# Altium PCB PCB2.PcbDoc
Units mil, origin at the board's own origin, x right, y up, seen from the top; angles counter-clockwise.
Board outline 1985 x 1860 mil, 2 copper layers (Top Layer, Bottom Layer); 58 components, 44 nets, 226 pads, 52 vias.
Unrouted connection lines stored in the file: 9.
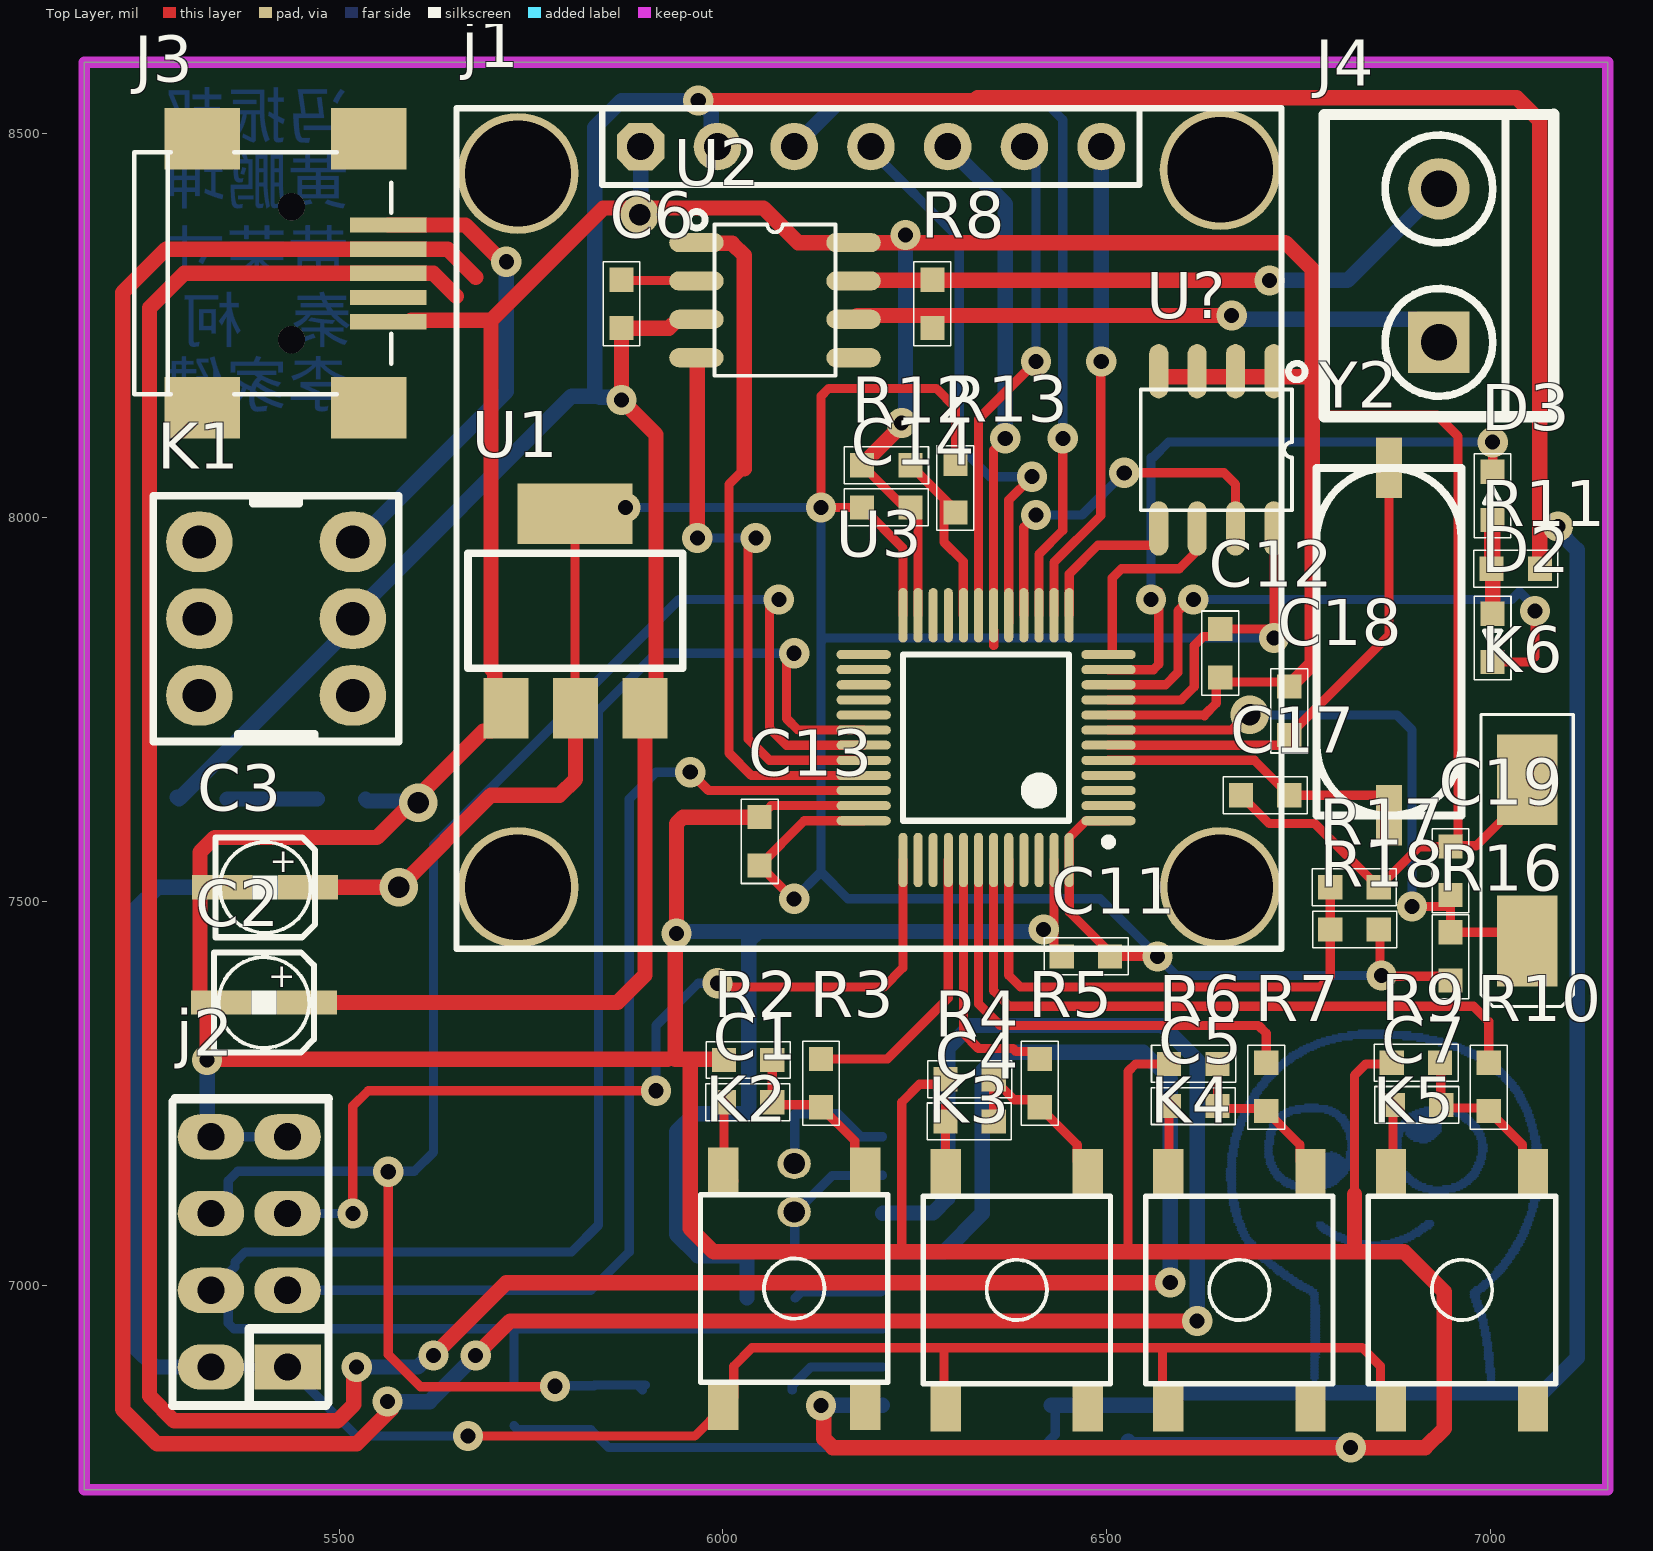
[diagram p0: Top Layer view]
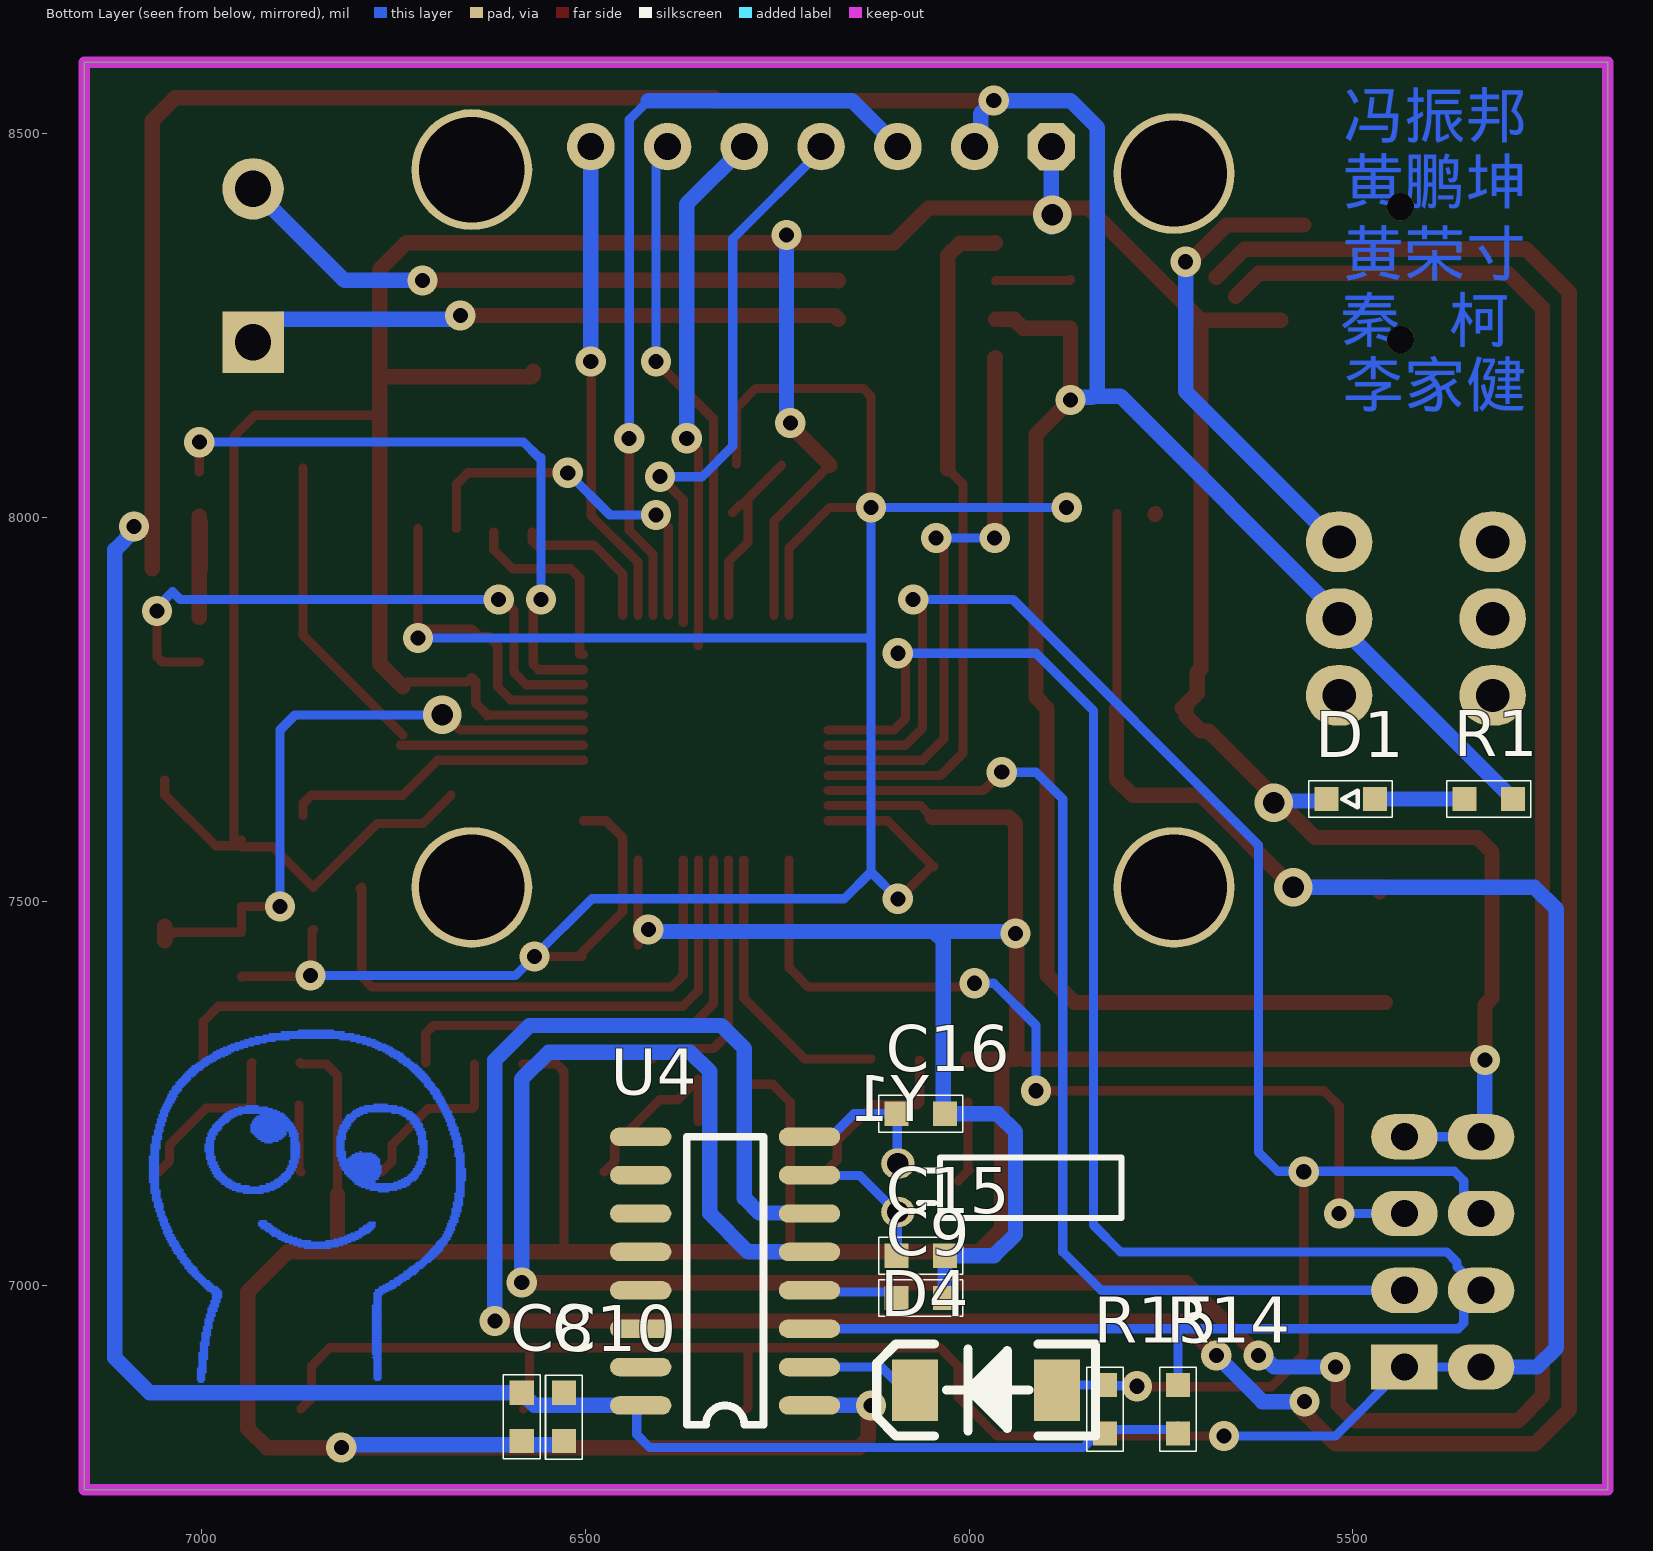
[diagram p1: Bottom Layer view, seen from below]
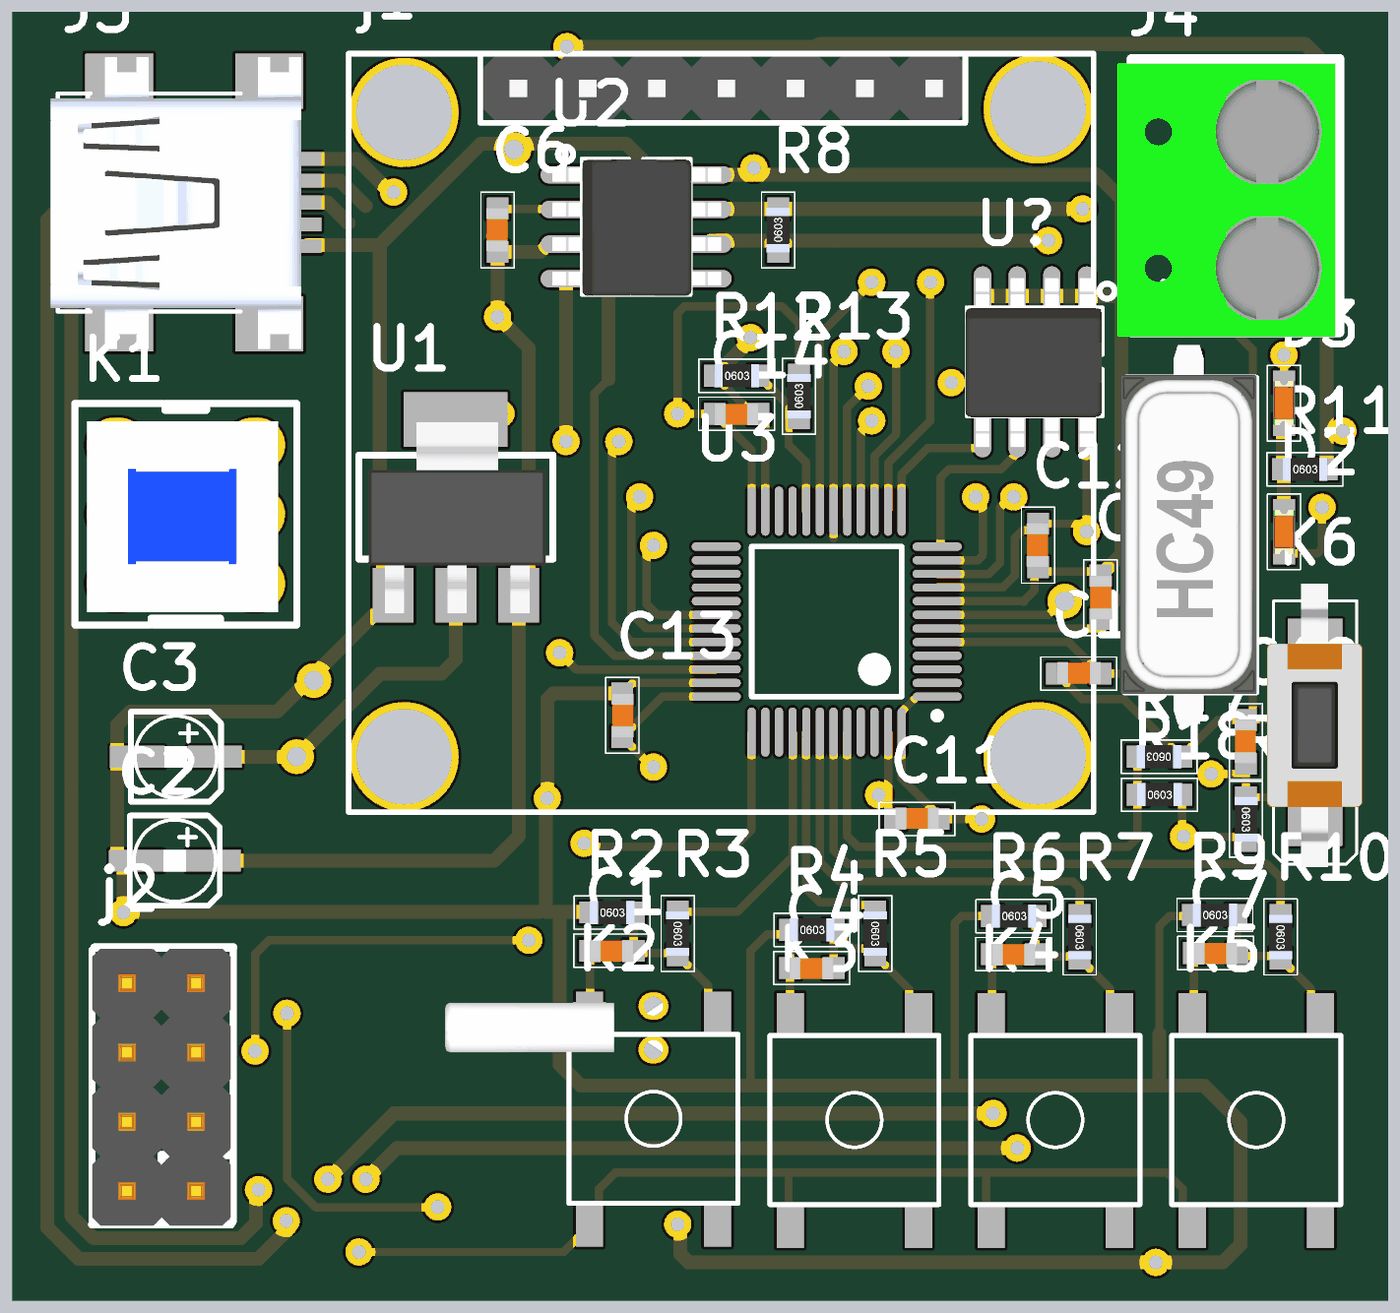
[diagram p2: 3D render of the assembled board from above, using the file's embedded part models]
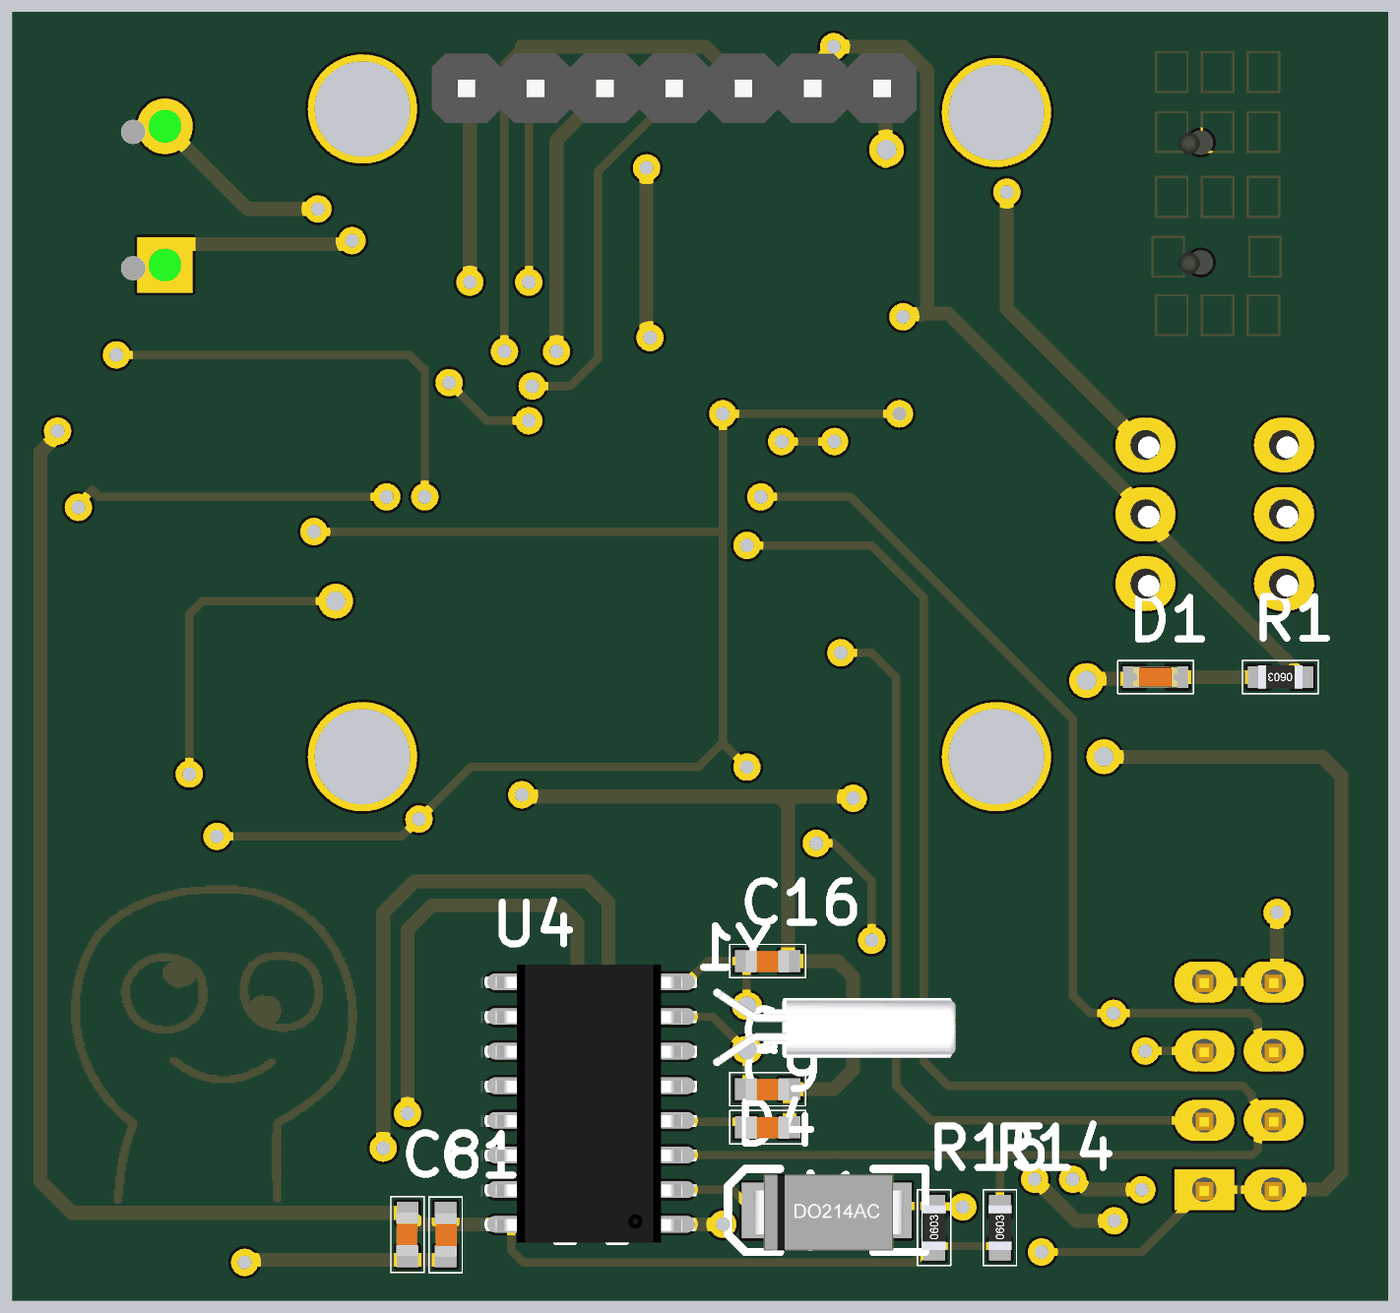
[diagram p3: 3D render of the assembled board from below, using the file's embedded part models]

## Layer stack, top to bottom
Top Solder: solder mask 0.4, Solder Resist, Dk 3.5
Top Layer: signal copper 1.4
Dielectric 1: dielectric 12.6, FR-4, Dk 4.8
Bottom Layer: signal copper 1.4
Bottom Solder: solder mask 0.4, Solder Resist, Dk 3.5

## Board outline
5168,6733.5 7153,6733.5 7153,8593.5 5168,8593.5

## Design rules (kind name [scope] priority, off if disabled: settings)
Clearance [All] p1: gap=5 ignorepadtopadclearanceinfootprint=FALSE
PolygonConnect [All] p1: connectstyle=Relief reliefconductorwidth=10 reliefentries=4 polygonreliefangle="90 Angle" airgapwidth=10
RoutingVias [All] p1: holewidth=19.68 width=39.37 viastyle="Through Hole" minholewidth=7.87 minwidth=10 maxholewidth=500 maxwidth=500
SolderMaskExpansion [All] p1: expansion=4
Width [All] p1: maxlimit=50 minlimit=10 preferedwidth=20
30 further rules are at their usual default settings.

## Components (designator, comment, footprint, x,y, rotation, side; value= is the part's Value field where it differs from the comment)
C1 "104" C_0603 6033,7238.5 r180 top
C2 "10uf" SMD-EC-F3 5458,7368.5 r180 top
C3 "10uf" SMD-EC-F3 5459.61,7518.5 r180 top
C4 "104" C_0603 6321.58,7213.5 r180 top
C5 "104" C_0603 6613,7233.5 r180 top
C6 "107" C_0603 5868,8278.5 r90 top
C7 "104" C_0603 6904.5,7235 r180 top
C8 "104" C_0603 6583,6828.5 r90 bottom
C9 "103" C_0603 6063,6983.5 r0 bottom
C10 "22U" C_0603 6528,6828.5 r270 bottom
C11 "104" C_0603 6473,7428.5 r0 top
C12 "104" C_0603 6648,7823.5 r90 top
C13 "104" C_0603 6048,7578.5 r270 top
C14 "104" C_0603 6213,8013.5 r180 top
C15 "22P" C_0603 6063,7038.5 r0 bottom
C16 "22P" C_0603 6063,7223.5 r0 bottom
C17 "22P" C_0603 6706.5,7638.5 r0 top
C18 "22P" C_0603 6738,7748.5 r270 top
C19 "104" C_0603 6948,7540 r90 top
D1 "LED" LED_0603 5503,7633.5 r0 bottom value=BLUE
D2 "LED" LED_0603 7003,7843.5 r270 top value=BLUE
D3 "LED" LED_0603 7003,8028.5 r90 top value=BLUE
D4 "SMAJ5.0CA" DO-214-A 5978,6863.5 r0 bottom
j1 "OLED" OLED_7 6113,8433.5 r0 top locked
j2 "COM4x2-2.54" COM4X2-2.54 5383,7043.5 r90 top
J3 "USB-MINI" USB-MINI 5443,8318.5 r90 top locked
J4 "CON_2PIN" CON_2PIN 6933,8328.5 r270 top
K1 "SW-6" SW-6 5418,7868.5 r180 top
K2 "SW-PB" SW6.2/6.2-SMD 6093,6995.24 r270 top
K3 "SW-PB" SW6.2/6.2-SMD 6383,6993.5 r270 top
K4 "SW-PB" SW6.2/6.2-SMD 6673,6993.5 r270 top
K5 "SW-PB" SW6.2/6.2-SMD 6963,6993.5 r270 top
K6 "SW-PB" SW-PB4 7048,7553.5 r90 top
R1 "1K" R_0603 5323,7633.5 r0 bottom
R2 "4.7k" R_0603 6033,7293.5 r0 top
R3 "1k" R_0603 6128,7263.5 r270 top
R4 "4.7k" R_0603 6321.58,7268.5 r0 top
R5 "1k" R_0603 6413,7263.5 r270 top
R6 "4.7k" R_0603 6613,7288.5 r0 top
R7 "1k" R_0603 6708,7258.5 r270 top
R8 "120R" R_0603 6273,8278.5 r90 top
R9 "4.7k" R_0603 6903,7290 r0 top
R10 "1k" R_0603 6998,7258.5 r270 top
R11 "1K" R_0603 7033,7933.5 r0 top
R12 "10K" R_0603 6213,8068.5 r0 top
R13 "10K" R_0603 6303,8038.5 r90 top
R14 "10k" R_0603 5728,6838.5 r90 bottom
R15 "10k" R_0603 5823,6838.5 r90 bottom
R16 "10K" R_0603 6948,7428.5 r270 top
R17 "10K" R_0603 6823,7518.5 r180 top
R18 "10K" R_0603 6823,7463.5 r0 top
U1 "AMS1117" SOT-223 5808,7878.5 r0 top
U2 "TJA1050" SOP8 6068,8283.5 r0 top
U3 "STM32F102CBT6" STM-LQFP48_N 6343,7713.5 r180 top locked
U4 "CH340G" SOP16 6318,7018.5 r0 bottom
U? "AT24C02" SOP8 6643,8088.5 r270 top
Y1 "XTAL_32.768KHZ" CRYS-3X8 6093,7127.01 r0 bottom value=12MHz
Y2 "XTAL_49US" XTAL_SMD 6868,7838.5 r270 top value=8MHz

## Footprints (in the part's own frame and the unit in brackets; to place one, negate y for a bottom-side part, rotate by r counter-clockwise, add the part's x,y. Pads: shape width x height; smd on the part's side, far side on the other; paste and mask are expansions set on the pad)
C_0603 [mm]
  rect 0.8x0.8 smd: 1(-0.8,0) 2(0.8,0)
  silkscreen extent -1.38,-0.61 1.4,0.61, body extent -0.79,-0.38 0.81,0.42, height 0.5
COM4X2-2.54 [mm]
  rect 1.5x2.2 hole 0.9: 1(-3.81,-1.27)
  oval 1.5x2.2 hole 0.9: 2(-3.81,1.27) 3(-1.27,-1.27) 4(-1.27,1.27) 5(1.27,-1.27) 6(1.27,1.27) 7(3.81,-1.27) 8(3.81,1.27)
  silkscreen extent -5.08,-2.63 5.07,2.54, body extent -5.13,-2.54 5.03,2.54, height 10.1
CON_2PIN [mil]
  rect 80x80 hole 47.24: 1(100,0)
  round 80 hole 47.24: 2(-100,0)
  silkscreen extent -197,-150 197,150, body extent -190,-171 203,144, height 433
CRYS-3X8 [mm]
  oval 1.1x1 hole 0.7: 1(0,0.8) 2(0,-0.8)
  silkscreen extent -7.4,-1 -0.7,1, body extent -7.64,-1.44 1.24,1.41, height 1.47
DO-214-A [mil]
  rect 60x80 smd: 1(-92.5,0) 2(92.5,0)
  silkscreen extent -143,-60 142,60, body extent -111,-52 105,58, height 90
LED_0603 [mm]
  rect 0.8x0.8 smd: 1(-0.8,0) 2(0.8,0)
  silkscreen extent -1.38,-0.6 1.39,0.61, body extent -0.8,-0.4 0.82,0.4, height 0.6
OLED_7 [mil]
  round 157.48 hole 137.8: 0(-380,-915) 0(-380,15) 0(535,-915) 0(535,20)
  oct 62x62 hole 35: 1(-220,50)
  round 62 hole 35: 2(-120,50) 3(-20,50) 4(80,50) 5(180,50) 6(280,50) 7(380,50)
  silkscreen extent -460,-995 615,100, body extent -265,0 435,100, height 118
R_0603 [mm]
  rect 0.8x0.8 smd: 1(-0.8,0) 2(0.8,0)
  silkscreen extent -1.38,-0.61 1.4,0.61, body extent -0.81,-0.42 0.83,0.43, height 0.46
SMD-EC-F3 [mm]
  rect 2x0.8 smd: 1(0,0) 2(2.835,0)
  silkscreen extent -0.23,-1.65 3.07,1.65
SOP8 [mm]
  oval 1.8x0.635 smd: 1(-2.6,1.905) 2(-2.6,0.635) 3(-2.6,-0.635) 4(-2.6,-1.905) 5(2.6,-1.905) 6(2.6,-0.635) 7(2.6,0.635) 8(2.6,1.905)
  silkscreen extent -2.86,-2.5 2,2.94, body extent -3.07,-2.54 3.13,2.46, height 1.74
SOP16 [mil]
  oval 80x24 smd: 1(-110,175) 2(-110,125) 3(-110,75) 4(-110,25) 5(-110,-25) 6(-110,-75) 7(-110,-125) 8(-110,-175) 9(110,-175) 10(110,-125) 11(110,-75) 12(110,-25) 13(110,25) 14(110,75) 15(110,125) 16(110,175)
  silkscreen extent -50,-175 50,200, body extent -153,-200 159,202, height 71
SOT-223 [mil]
  rect 59x79 smd: 1(-90.55,-126.77) 2(0,-126.77) 3(90.55,-126.77)
  rect 150x79 smd: 2(-0.67,126.77)
  silkscreen extent -140,-75 140,75, body extent -126,-153 130,123, height 65
STM-LQFP48_N [mm] "QFP, 48-Leads, Body 7x7mm, Pitch 0.5mm, IPC Medium Density"
  oval 1.8x0.3 smd: 1(-4.05,2.75) 2(-4.05,2.25) 3(-4.05,1.75) 4(-4.05,1.25) 5(-4.05,0.75) 6(-4.05,0.25) 7(-4.05,-0.25) 8(-4.05,-0.75) 9(-4.05,-1.25) 10(-4.05,-1.75) 11(-4.05,-2.25) 12(-4.05,-2.75) 25(4.05,-2.75) 26(4.05,-2.25) 27(4.05,-1.75) 28(4.05,-1.25) 29(4.05,-0.75) 30(4.05,-0.25) 31(4.05,0.25) 32(4.05,0.75) 33(4.05,1.25) 34(4.05,1.75) 35(4.05,2.25) 36(4.05,2.75)
  oval 0.3x1.8 smd: 13(-2.75,-4.05) 14(-2.25,-4.05) 15(-1.75,-4.05) 16(-1.25,-4.05) 17(-0.75,-4.05) 18(-0.25,-4.05) 19(0.25,-4.05) 20(0.75,-4.05) 21(1.25,-4.05) 22(1.75,-4.05) 23(2.25,-4.05) 24(2.75,-4.05) 37(2.75,4.05) 38(2.25,4.05) 39(1.75,4.05) 40(1.25,4.05) 41(0.75,4.05) 42(0.25,4.05) 43(-0.25,4.05) 44(-0.75,4.05) 45(-1.25,4.05) 46(-1.75,4.05) 47(-2.25,4.05) 48(-2.75,4.05)
  silkscreen extent -4.18,-2.75 2.75,3.57, body extent -3.5,-3.5 3.5,3.5, height 1.6
SW6.2/6.2-SMD [mm]
  rect 1.5x1 smd: 1(-3.924,2.35) 1(3.924,2.35) 2(-3.924,-2.35) 2(3.924,-2.35)
  silkscreen extent -3.11,-3.1 3.09,3.1
SW-6 [mm]
  oval 2.2x2 hole 1.1: 1(-2.54,2.54) 2(-2.54,0) 3(-2.54,-2.54) 4(2.54,2.54) 5(2.54,0) 6(2.54,-2.54)
  silkscreen extent -4.06,-4.06 4.06,4.06, body extent -3.38,-3.41 3.62,3.59, height 13
SW-PB4 [mm]
  rect 3x2 smd: 1(-2.667,0) 2(2.667,0)
  silkscreen extent -4.83,-1.52 4.83,1.52, body extent -4.94,-1.73 5.46,1.77, height 5
USB-MINI [mm]
  rect 0.508x2.54 smd: 1(1.6,-3.075) 2(0.8,-3.075) 3(0,-3.075) 4(-0.8,-3.075) 5(-1.6,-3.075)
  rect 2.032x2.5 smd: 6(-4.45,-2.425) 7(-4.45,3.075) 8(4.45,3.075) 9(4.45,-2.425)
  round 0.9 hole 0.9 unplated: 10(2.2,0.125) 11(-2.2,0.125)
  silkscreen extent -4,-3.17 4,5.33, body extent -5.38,-3.61 5.32,5.59, height 3.95
XTAL_SMD [mm]
  rect 2x0.85 smd: 1(-5.75,0) 2(5.75,0)
  silkscreen extent -5.75,-2.4 5.75,2.4, body extent -6.97,-2.56 6.93,2.44, height 4.5

## Part data
C1 C4 C5 C6 C7 C8 C9 C10 C11 C12 C13 C14 C15 C16 C17 C18 C19: library part CAP
C2 C3: library part CAP+
D4: "SMAJ5.0CA-E3/61 400W 5V", Manufacture 1 P/N=SMAJ5.0CA, PCB DECAL=DO-214
j1: library part COM7-2.54
R1 R2 R3 R4 R5 R6 R7 R8 R9 R10 R11 R12 R13 R14 R15 R16 R17 R18: library part RES
U3: "ARM Cortex-M3 32-bit MCU, 128 KB Flash, 16 KB Internal RAM, 37 I/Os, 48-pin LQFP, -40 to 85 degC, Tray", I/Os (High Current)=37, Operating Frequency(F) (Processor speed) (MHz)=48, Supplier Part Number 1=497-8308-ND, Supply Voltage(Vcc) min (V)=2, A/D Converter="1x12-bit (10 Channel)", ComponentLink1Description="Manufacturer URL", ComponentLink1URL=http://www.st.com/web/en/home.html, ComponentLink2Description=Datasheet, ComponentLink2URL=http://www.st.com/st-web-ui/static/active/en/resource/technical/document/datasheet/CD00210831.pdf, ComponentLink3Description="Package Specification", ComponentLink3URL=http://www.st.com/st-web-ui/static/active/en/resource/technical/document/datasheet/DM00058181.pdf, Core="ARM Cortex-M3", DatasheetVersion="Rev. 5", FLASH Size (Prog) (kB)=128, Internal RAM Size (kB)=16, Mounting Technology="Surface Mount", PackageDescription="48-Pin Low Profile Quad Flat Package, 7 x 7 mm Body, 0.5 mm Pitch", PackageReference=LQFP48, PackageVersion="Rev. 6, 06/2013", Packing=Tray, PartNumber=STM32F102CBT6, Supplier 1=Digi-Key, Supplier 2=Farnell, Supplier 3=Newark, Supplier 4=Newark, Supplier 5=Mouser, Supplier Part Number 2=2333154, Supplier Part Number 3=99W9776, Supplier Part Number 4=25R9430, Supplier Part Number 5=511-STM32F102CBT6
D1 D2 D3: PCB DECAL=LED_0603
J3: PCB DECAL=USB-MINI
J4: PCB DECAL=CON_2PIN
U2 U?: PCB DECAL=SOP8
U4: PCB DECAL=SOP16
Y1: PCB DECAL=CRYS-3X8
Y2: PCB DECAL=XTAL_SMD

## Via types
v1: diameter 39.37, hole 19.68, Top Layer to Bottom Layer, 48 vias
v2: diameter 50, hole 28, Top Layer to Bottom Layer, 4 vias

## Nets (pads, with @x,y where several pads share a name; then routed paths per layer and width w, separated by ;. In a path a pad name is that pad's centre, name@x,y a point inside that pad or via, vN(x,y) a via of type N, cw(c..) or ccw(c..) an arc to the next point about the centre after c; other vN are vias at no path point)
3V3: C1.2 C3.1 C4.2 C5.2 C7.2 C11.2 C12.2 C13.2 C14.2 j2.1 j2.2 K2.2 K3.2 K4.2 K5.2 R13.2 R16.2 R18.2 U1.2 U3.1 U3.9 U3.24 U3.36 U3.48 U?.8 | length 7935.3
  Top Layer w12: v1(5668,6803.5) 5963.25,6803.5 6000.48,6840.74 6014.17,6854.42 6014.17,6894.67 6038,6918.5 6288,6918.5 ; U1.2@5807.33,8005.28 5807.33,7752.4 U1.2@5808,7751.73 ; C1.2 6001.5,7150.76 6000.48,7149.74 K2.2@6014.17,7136.05 ; v1(6093,7503.5) 6091.5,7503.5 6049.75,7545.26 6046.25,7545.26 C13.2 6106.23,7605.24 U3.36 ; v1(6128,8013.5) C14.2 6234.73,7960.28 U3.24 ; v1@6128,8023.79 6128,8158.5 6138,8168.5 6278,8168.5 6303,8143.5 R13.2 ; 6290.09,7238.5 C4.2 6290.09,7148.4 K3.2@6290.48,7148 ; K3.2@6290.48,6839 6288,6841.48 6288,6918.5 ; U3.1 6473.11,7605.24 6451.27,7583.39 U3.48 6451.27,7486.73 C11.2@6509.5,7428.5 ; U3.9 6597.21,7762.72 6614.25,7779.76 6614.25,7833.5 6626,7845.25 6638.25,7845.25 C12.2 v1@6717.09,7855 ; C11.2 C11.2@6509.5,7428.5 ; v1(6566.47,7428.5) C11.2@6509.5,7428.5 ; K4.2@6580.48,6839 6573,6846.48 6573,6918.5 ; K4.2@6580.48,7148 6581.5,7149.03 C5.2 ; v1(6718,7843.5) v1@6710.41,7843.5 ; U?.8 6718,7855.91 v1@6717.09,7855 ; R18.2 6856.25,7461.75 6856.25,7405.26 v1(6858,7403.5) 6858.75,7402.76 6947.25,7402.76 R16.2@6948,7402.01 ; K5.2@6870.48,6839 6856.8,6852.69 6856.8,6894.71 6833,6918.5 6573,6918.5 ; K5.2@6870.48,7148 6873,7150.52 C7.2 ; 6288,6918.5 6573,6918.5 ; v1@6708,7845.91 v1@6710.41,7843.5 ; v1@6708,7845.91 6705.59,7843.5 v1@6710.41,7843.5 ; v1@6708,7845.91 v1@6717.09,7855
  Top Layer w20: C3.1@5465.35,7512.76 C3.1 v2(5578,7518.5) 5698,7638.5 5787.33,7638.5 5808,7659.17 U1.2@5808,7751.73 ; U1.2@5757.33,8005.28 U1.2@5758,8004.61
  Bottom Layer w12: j2.2 j2.1 5523,6803.5 v1(5668,6803.5) ; v1(5873,8013.5) v1(6128,8013.5) 6128,7838.5 ; v1(6093,7503.5) 6128,7538.5 ; v1(6718,7843.5) 6133,7843.5 6128,7838.5 ; v1(6858,7403.5) 6591.47,7403.5 v1(6566.47,7428.5) 6491.47,7503.5 6163,7503.5 6128,7538.5 ; 6128,7538.5 6128,7838.5
  Bottom Layer w20: j2.2 5260,6893.5 5235,6918.5 5235,7490 5263.5,7518.5 v2(5578,7518.5)
5V: C2.1 C6.1 C8.2 C10.1 j1.2 K1.2 R1.1 R11.2 R14.1 R15.1 U1.3 U2.3 U4.16 | length 7065.5
  Top Layer w20: C2.1 5863,7368.5 5898.55,7404.06 U1.3 5913,7766.18 5913,8108.5 v1(5868,8153.5) C6.1 5929.86,8247.01 5941.35,8258.5 U2.3 ; v1(5968,8543.5) 6328.16,8543.5 6331.91,8547.24 7034.26,8547.24 7064.5,8517.01 R11.2
  Bottom Layer w12: R14.1@5728,6817.01 5733,6812.01 5828,6812.01 5851.5,6788.5 6415.97,6788.5 6433,6805.53 6433,6838.5 U4.16
  Bottom Layer w20: R1.1 5289.26,7635.75 5293.75,7635.75 5518,7860 K1.2 5518,7873.5 5803,8158.5 5833,8158.5 ; v1(5868,8153.5) 5864.29,8157.21 5839.61,8157.21 5838.31,8158.5 5833,8158.5 ; j1.2 5984.96,8491.54 5984.96,8526.54 v1(5968,8543.5) 5868,8543.5 5833,8508.5 5833,8158.5 ; U4.16 6566.5,6843.5 C8.2 7067.47,6860 7113,6905.53 7113,7958.26 7088,7983.26 v1(7088,7988.5)
24C02_SCL: U3.12 U?.6 | length 254.8
  Top Layer w12: U3.12 6507.37,7821.77 6507.47,7821.87 6507.47,7921.47 6519.5,7933.5 6594.79,7933.5 6619.5,7958.21 U?.6@6619.5,7981.14
24C02_SDA: U3.13 U?.5 | length 201
  Top Layer w12: U3.13 6451.27,7926.77 6488.7,7964.21 6563.49,7964.21 6569.5,7970.21 U?.5@6569.5,7981.14
24C02_WP: U3.16 U?.7 | length 483.4
  Top Layer w12: U3.16 6392.21,7987.72 v1(6408,8003.5) ; v1(6523,8058.5) 6653,8058.5 6668,8043.5 U?.7
  Bottom Layer w12: v1(6408,8003.5) 6468,8003.5 v1(6523,8058.5)
CAN_RX: U2.4 U3.32 | length 739.6
  Top Layer w12: v1(6043,7973.5) 6043,7970.26 6033,7960.26 6033,7711.75 6060.78,7683.98 U3.32
  Top Layer w20: U2.4 5966.82,8207.32 v1(5966.82,7973.5)
  Bottom Layer w12: v1(5966.82,7973.5) v1(6043,7973.5)
CAN_TX: U2.1 U3.33 | length 913.5
  Top Layer w12: 6028,8063.5 6008,8043.5 6008,7693.5 6037.21,7664.29 U3.33
  Top Layer w20: U2.1 5966.59,8357.55 6012.24,8357.55 6028,8341.79 6028,8063.5
D+: J3.3 U4.5 | length 4163.7
  Top Layer w20: v1(5523,6893.5) 5519.29,6889.8 5519.29,6844.8 5498,6823.5 5285.23,6823.5 5253,6855.74 5253,8273.5 5298,8318.5 J3.3 5623,8318.5 5653,8288.5 ; v1(5623,6908.5) 5718,7003.5 v1(6583,7003.5)
  Bottom Layer w20: v1(5523,6893.5) 5602.76,6893.5 5617.76,6908.5 v1(5623,6908.5) ; U4.5 6288,7043.5 6338,7093.5 6338,7278.5 6363,7303.5 6548,7303.5 6583,7268.5 v1(6583,7003.5)
D-: J3.2 U4.6 | length 4430.7
  Top Layer w20: v1@5568,6838.5 5523,6793.5 5263,6793.5 5218,6838.5 5218,8293.5 5274.5,8350 J3.2 5641.5,8350 5678,8313.5 ; v1@5683,6903.5 v1(5678,6908.5) 5723,6953.5 v1(6618,6953.5)
  Bottom Layer w20: v1(5563,6848.5) 5618,6848.5 v1(5678,6908.5) ; U4.6 6208.77,7094.27 6273.77,7094.27 6293,7113.5 6293,7308.5 6323,7338.5 6573,7338.5 6618,7293.5 v1(6618,6953.5)
GND: C2.2 C3.2 C8.1 C9.1 C10.2 C11.1 C12.1 C13.1 C14.1 C15.1 C16.1 C17.1 C18.1 C19.2 D1.2 j1.1 j2.7 j2.8 J3.5 K6.2 R2.1 R4.1 R6.1 R9.1 R12.1 R17.1 U1.1 U2.8 U3.8 U3.23 U3.35 U3.47 U4.1 U?.1 U?.2 U?.3 U?.4 | length 11822.4
  Top Layer w12: C13.1 6062.92,7624.92 U3.35 ; R12.1 6254.46,7995.55 6254.46,7883.54 6254.42,7883.5 U3.23 ; 6233,7043.5 6233,7238.5 6256.34,7261.84 6283.43,7261.84 R4.1 ; C11.1@6431.58,7443.43 U3.47 ; 6528,7043.5 6528,7278.5 6538,7288.5 R6.1 ; 6627.53,7742.01 6626.6,7742.94 6502.54,7742.94 U3.8 6627.53,7743.03 6642.76,7758.26 6642.76,7786.76 C12.1 6654,7786 6732,7786 C18.1 ; C17.1 6711.98,7601.53 6771.47,7601.53 R17.1 6907.49,7571.5 C19.2 6949.07,7572.57 6981.75,7572.57 7048,7638.82 K6.2 ; 6768,8133.5 6930.4,8133.5 6958,8105.91 6958,7580.31 C19.2@6948,7580.31 ; 6823,7118.5 6823,7273.5 6837.76,7288.26 6869.76,7288.26 R9.1
  Top Layer w20: v1(5328,7293.5) v1@5328,7301.73 ; J3.5@5593.98,8257.13 5698,8257.13 ; U1.1 5717.45,7741.73 5697.95,7722.23 5687.95,7722.23 5549.22,7583.5 5338,7583.5 5318.78,7564.29 5318.78,7374.25 5328,7365.04 v1@5328,7301.73 ; U1.1@5722.45,7751.73 5702.95,7771.23 5702.95,7798.56 5698,7803.5 5698,8257.13 ; 5928,7294.51 5338.76,7294.51 5329.77,7303.5 v1@5328,7301.73 ; v1@5938,7448.5 5938,7294.51 5957.56,7294.51 ; v1(5939.72,7458.5) 5939.72,7601.53 5948.19,7610 C13.1 ; R2.1 6000.49,7294.51 5957.56,7294.51 ; v1(6128,6843.5) 6131.71,6839.8 6131.71,6800.22 6143.42,6788.5 v1(6818,6788.5) 6914.99,6788.5 6939.99,6813.5 6939.99,6991.52 6888,7043.5 6828,7043.5 ; R12.1 6233,8120 v1(6233,8123.5) ; U?.4 6568,8185.81 6570.31,8183.5 6768,8183.5 ; C18.1 6768,7810 6768,8133.5 6768,8183.5 ; 6823,7118.5 6823,7048.5 6828,7043.5 ; 5698,8257.13 5844.38,8403.5 6053,8403.5 6098,8358.5 U2.8 6733,8358.5 6768,8323.5 6768,8183.5 ; 5957.56,7294.51 5957.56,7073.94 5988,7043.5 6233,7043.5 6528,7043.5 6828,7043.5
  Bottom Layer w12: j2.8 j2.7
  Bottom Layer w20: v1(5328,7293.5) 5328,7299.56 5328.24,7299.8 5328.24,7198.27 j2.8 ; D1.2 5537,7631 5600.5,7631 v2(5603,7628.5) ; v2@5893,8378.5 j1.1 ; v1(5939.72,7458.5) 5942.22,7461 6046.25,7461 ; C9.1 C15.1 5967.57,7038.5 5939.72,7066.36 5939.72,7200.22 5963,7223.5 C16.1 6033.75,7225.75 6033.75,7448.5 6046.25,7461 ; v1(6128,6843.5) U4.1 ; v1(6233,8123.5) 6238,8128.5 v1(6238,8368.5) ; v1(6418,7463.5) 6415.5,7461 6046.25,7461 ; C10.2 6532.8,6792.21 6814.29,6792.21 v1(6818,6788.5)
  other v2: 5891.62,8394.88
KEY1: R3.1 U3.40 | length 378.4
  Top Layer w12: R3.1 6214.5,7295 6293.79,7374.29 U3.40
KEY2: R5.1 U3.41 | length 339.1
  Top Layer w12: U3.41 6313.47,7328.19 6333.16,7308.5 6378,7308.5 6381.76,7304.75 6403.25,7304.75 R5.1
KEY3: R7.1 U3.42 | length 616.5
  Top Layer w12: U3.42 6333.16,7366.67 6361.33,7338.5 6698,7338.5 6708,7328.5 R7.1
KEY4: R10.1 U3.43 | length 885.7
  Top Layer w12: U3.43 6352.84,7383.66 6373,7363.5 6978,7363.5 6998,7343.5 R10.1
NetC1_1: C1.1 K2.1 R2.2 R3.2 | length 227.3
  Top Layer w12: R2.2 C1.1 6067.74,7235.26 6124.75,7235.26 R3.2 6171.83,7188.17 6171.83,7163.42 K2.1@6185.52,7149.74
NetC4_1: C4.1 K3.1 R4.2 R5.2 | length 239.9
  Top Layer w12: C4.1 R4.2 6379.83,7241.76 6403.25,7241.76 R5.2 6461.83,7183.17 6461.83,7161.69 K3.1@6475.52,7148
NetC5_1: C5.1 K4.1 R6.2 R7.2 | length 224
  Top Layer w12: R6.2 C5.1 6647.74,7230.26 6704.75,7230.26 R7.2 6751.83,7183.17 6751.83,7161.69 K4.1@6765.52,7148
NetC6_2: C6.2 U2.2 | length 98.3
  Top Layer w12: C6.2 5868.75,8309.25 5964.89,8309.25 U2.2
NetC7_1: C7.1 K5.1 R9.2 R10.2 | length 223.8
  Top Layer w12: R9.2 6935.24,7289.25 6935.24,7235.75 C7.1 6939.99,7231 6994,7231 R10.2 7041.83,7183.17 7041.83,7161.69 K5.1@7055.52,7148
NetC9_2: C9.2 U4.4 | length 117.6
  Bottom Layer w12: C9.2 6102.2,6991.21 6205.7,6991.21 U4.4
NetC15_2: C15.2 U4.7 Y1.1 | length 192.5
  Bottom Layer w12: C15.2 6093.75,7039.25 6093.75,7094.76 Y1.1 6094.97,7095.51 6142.59,7143.14 6207.63,7143.14 U4.7
NetC16_2: C16.2 U4.8 Y1.2 | length 191.6
  Bottom Layer w12: Y1.2 6093.75,7159.25 6093.75,7222.76 C16.2 6150,7223.5 6180,7193.5 U4.8
NetC17_2: C17.2 U3.5 Y2.2 | length 404.5
  Top Layer w12: U3.5 6692.53,7683.98 C17.2 6857.27,7638.5 6868,7627.77 Y2.2
NetC18_2: C18.2 U3.6 Y2.1 | length 640.3
  Top Layer w12: U3.6 C18.2@6740.99,7703.66 ; C18.2 6868,7847.01 Y2.1
NetD1_1: D1.1 R1.2 | length 117
  Bottom Layer w20: R1.2 D1.1
NetD2_1: D2.1 D3.1 R11.1 | length 191.9
  Top Layer w20: R11.1 D3.1@7001.5,7993.5 ; D2.1@7003,7870 7003,7933.5 D3.1@7003,8001.89
NetD2_2: D2.2 U3.10 | length 783.2
  Top Layer w12: U3.10 6576.9,7782.4 6593,7798.5 6593,7878.5 6608,7893.5 v1(6613,7893.5) ; D2.2 7050.97,7812.01 7058,7819.04 v1(7058,7878.5)
  Bottom Layer w12: v1(6613,7893.5) 7028,7893.5 7038,7903.5 7058,7883.5 v1(7058,7878.5)
NetD3_2: D3.2 U3.11 | length 853.8
  Top Layer w12: U3.11 6560.97,7802.09 6568,7809.12 6568,7903.5 v1(6558,7893.5) ; D3.2 v1(7003,8098.5)
  Bottom Layer w12: v1(6558,7893.5) 6558,8078.5 6560.48,8078.5 6580.48,8098.5 v1(7003,8098.5)
NetD4_2: D4.2 U4.2 | length 133.4
  Bottom Layer w12: D4.2@6090.5,6863.5 6090.5,6869.5 6114.5,6893.5 U4.2
NetJ4_1: J4.1 R8.1 U2.6 | length 779.2
  Top Layer w20: U2.6 6175.36,8263.5 v1(6663,8263.5)
  Bottom Layer w20: v1(6663,8263.5) 6668,8258.5 6903,8258.5 J4.1
NetJ4_2: J4.2 R8.2 U2.7 | length 812.3
  Top Layer w20: U2.7 6171.11,8309.25 v1(6712.25,8309.25)
  Bottom Layer w20: v1(6712.25,8309.25) 6813.75,8309.25 J4.2
NetR12_2: R12.2 R13.1 U3.20 | length 251.6
  Top Layer w12: R12.2 6288,8025 ; R13.1@6308,8007.01 6298.25,8016.76 6296.24,8016.76 6288,8025 ; U3.20 6313.38,7873.05 6313.38,7943.13 6288,7968.5 6288,8025
NetR17_2: R17.2 R18.1 U3.44 | length 700.2
  Top Layer w12: U3.44 6372.53,7403.98 6388,7388.5 6778,7388.5 6791.5,7402.01 R18.1 R17.2 R17.2@6793.38,7516.63
NRST: C19.1 K6.1 R16.1 U3.7 | length 860.5
  Top Layer w12: U3.7 6662.84,7723.35 v2@6693,7753.5 ; v1(6898,7493.5) 6948,7493.5 R16.1 7036.5,7460 K6.1
  Top Layer w20: K6.1 K6.1@7048,7468.19
  Bottom Layer w12: v2(6686.62,7743.11) 6878.39,7743.11 6898,7723.5 v1(6898,7493.5)
OLED_CS: j1.7 U3.14 | length 636
  Top Layer w12: U3.14 6431.58,7942.09 6492.31,8002.82 6492.31,8202.82 v1(6493,8203.5)
  Bottom Layer w20: v1(6493,8203.5) j1.7
OLED_DC: j1.6 U3.19 | length 647.8
  Top Layer w12: U3.19 6333.16,8128.66 v1(6408,8203.5)
  Bottom Layer w12: j1.6 6408,8468.5 v1(6408,8203.5)
OLED_RES: j1.5 U3.18 | length 707.3
  Top Layer w12: 6352.84,7833.58 U3.18 6352.84,8088.35 v1(6368,8103.5) ; 6352.92,7833.5 U3.18@6352.92,7853.5
  Bottom Layer w20: j1.5 6368,8408.5 v1(6368,8103.5)
OLED_SCK: j1.3 U3.15 | length 1043.6
  Top Layer w12: U3.15 6411.9,7952.4 6443,7983.5 v1(6443,8103.5)
  Bottom Layer w12: 6418,8543.5 6443,8518.5 v1(6443,8103.5)
  Bottom Layer w20: j1.3 6153,8543.5 6418,8543.5
OLED_SDA: j1.4 U3.17 | length 751.8
  Top Layer w12: U3.17@6372.53,7863.5 U3.17 6372.53,8023.03 v1(6403,8053.5)
  Bottom Layer w12: j1.4 6193,8478.5 6308,8363.5 6308,8093.5 6348,8053.5 v1(6403,8053.5)
RXD: j2.4 R14.2 U3.30 U4.3 | length 2677.1
  Top Layer w12: v1@6083,7828.5 6083,7738.5 6098.16,7723.35 U3.30
  Bottom Layer w12: j2.4 j2.4@5334.05,6993.5 ; R14.2 5728,6943.5 ; v1(6093,7823.5) 5913,7823.5 5838,7748.5 5838,7078.5 5803,7043.5 5378,7043.5 5364.51,7030.02 5364.51,7023.97 j2.4@5334.05,6993.5 ; U4.3 5728,6943.5 ; j2.4@5334.05,6993.5 5355.78,6971.77 5355.78,6950.72 5363,6943.5 5728,6943.5
SWCLK: j2.5 U3.37 | length 1189.4
  Top Layer w12: v1(5518,7093.5) 5518,7233.5 5538,7253.5 v1(5913,7253.5) ; 6012.24,7388.5 6209.64,7388.5 6234.64,7413.5 6234.64,7553.96 U3.37
  Bottom Layer w12: j2.5 v1(5518,7093.5) ; v1(5913,7253.5) 5913,7338.5 5968,7393.5 v1(5993,7393.5)
SWDIO: j2.3 U3.34 | length 1385.7
  Top Layer w12: v1(5957.56,7668.5) 5981.46,7644.61 U3.34
  Bottom Layer w12: j2.3 5828,6993.5 5878,7043.5 5878,7633.5 5913,7668.5 v1(5957.56,7668.5)
TXD: D4.1 j2.6 R15.2 U3.31 | length 2216
  Top Layer w12: v1(5564.06,7148) 5564.25,7147.82 5564.25,6909.75 5606.19,6867.82 5780.82,6867.82 v1(5781.5,6868.5) ; v1@6060.78,7891.36 6060.78,7725.95 6083.07,7703.66 U3.31
  Bottom Layer w12: j2.6 5334.05,7093.5 5355.78,7115.24 5355.78,7136.29 5368,7148.5 5598,7148.5 5623,7173.5 5623,7573.5 5943,7893.5 v1(6073,7893.5) ; v1(5781.5,6868.5) 5782.25,6869.25 5832.25,6869.25 5833,6870 D4.1@5889,6870 ; D4.1@5895.5,6863.5 D4.1@5889,6870 ; D4.1@5899,6870 D4.1@5889,6870
VCC: J3.1 K1.3 | length 635.9
  Top Layer w20: K1.3 K1.3@5518,7980.46 ; J3.1 5664.77,8381.5 5712.76,8333.5 v1(5718,8333.5)
  Bottom Layer w20: K1.3 5521.94,7968.5 5718,8164.57 v1(5718,8333.5)
pads on no net: j1.0 J3.4 J3.6 J3.7 J3.8 J3.9 J3.10 J3.11 K1.1 K1.4 K1.5 K1.6 U2.5 U3.2 U3.3 U3.4 U3.21 U3.22 U3.25 U3.26 U3.27 U3.28 U3.29 U3.38 U3.39 U3.45 U3.46 U4.9 U4.10 U4.11 U4.12 U4.13 U4.14 U4.15
copper on no net: | length 12584
  Bottom Layer w2: 6656,7136 6668,7136 ; 6656,7138 6668,7138 ; 6656,7140 6668,7140 ; 6656,7142 6668,7142 ; 6656,7144 6668,7144 ; 6656,7146 6668,7146 ; 6656,7148 6668,7148 ; 6656,7150 6668,7150 ; 6656,7152 6668,7152 ; 6658,7116 6670,7116 ; 6658,7118 6670,7118 ; 6658,7120 6670,7120 ; 6658,7122 6668,7122 ; 6658,7124 6668,7124 ; 6658,7126 6668,7126 ; 6658,7128 6668,7128 ; 6658,7130 6668,7130 ; 6658,7132 6668,7132 ; 6658,7134 6668,7134 ; 6658,7154 6668,7154 ; 6658,7156 6668,7156 ; 6658,7158 6668,7158 ; 6658,7160 6668,7160 ; 6658,7162 6668,7162 ; 6658,7164 6668,7164 ; 6658,7166 6668,7166 ; 6658,7168 6670,7168 ; 6658,7170 6670,7170 ; 6658,7172 6670,7172 ; 6660,7104 6672,7104 ; 6660,7106 6672,7106 ; 6660,7108 6672,7108 ; 6660,7110 6670,7110 ; 6660,7112 6670,7112 ; 6660,7114 6670,7114 ; 6660,7174 6670,7174 ; 6660,7176 6670,7176 ; 6660,7178 6670,7178 ; 6660,7180 6672,7180 ; 6660,7182 6672,7182 ; 6662,7096 6674,7096 ; 6662,7098 6674,7098 ; 6662,7100 6674,7100 ; 6662,7102 6672,7102 ; 6662,7184 6672,7184 ; 6662,7186 6672,7186 ; 6662,7188 6672,7188 ; 6662,7190 6674,7190 ; 6662,7192 6674,7192 ; 6664,7090 6676,7090 ; 6664,7092 6674,7092 ; 6664,7094 6674,7094 ; 6664,7194 6674,7194 ; 6664,7196 6676,7196 ; 6664,7198 6676,7198 ; 6666,7082 6678,7082 ; 6666,7084 6678,7084 ; 6666,7086 6676,7086 ; 6666,7088 6676,7088 ; 6666,7200 6676,7200 ; 6666,7202 6678,7202 ; 6666,7204 6678,7204 ; 6666,7206 6678,7206 ; 6668,7078 6680,7078 ; 6668,7080 6680,7080 ; 6668,7208 6680,7208 ; 6668,7210 6680,7210 ; 6670,7072 6682,7072 ; 6670,7074 6682,7074 ; 6670,7076 6680,7076 ; 6670,7212 6680,7212 ; 6670,7214 6682,7214 ; 6670,7216 6682,7216 ; 6672,7068 6684,7068 ; 6672,7070 6684,7070 ; 6672,7218 6684,7218 ; 6672,7220 6684,7220 ; 6674,7064 6686,7064 ; 6674,7066 6686,7066 ; 6674,7222 6686,7222 ; 6674,7224 6686,7224 ; 6674,7226 6688,7226 ; 6676,7060 6690,7060 ; 6676,7062 6688,7062 ; 6676,7228 6688,7228 ; 6678,7058 6692,7058 ; 6678,7230 6690,7230 ; 6678,7232 6690,7232 ; 6680,7054 6694,7054 ; 6680,7056 6694,7056 ; 6680,7234 6692,7234 ; 6680,7236 6692,7236 ; 6682,7052 6696,7052 ; 6682,7238 6694,7238 ; 6682,7240 6694,7240 ; 6684,7050 6698,7050 ; 6684,7242 6696,7242 ; 6684,7244 6698,7244 ; 6686,7046 6702,7046 ; 6686,7048 6700,7048 ; 6686,7246 6698,7246 ; 6688,7044 6704,7044 ; 6688,7248 6700,7248 ; 6688,7250 6702,7250 ; 6690,7042 6706,7042 ; 6690,7252 6702,7252 ; 6690,7254 6704,7254 ; 6692,7040 6708,7040 ; 6692,7256 6706,7256 ; 6694,7038 6710,7038 ; 6694,7258 6708,7258 ; 6696,7036 6712,7036 ; 6696,7260 6710,7260 ; 6696,7262 6710,7262 ; 6698,7034 6714,7034 ; 6698,7264 6712,7264 ; 6700,7032 6716,7032 ; 6700,7266 6714,7266 ; 6702,7030 6720,7030 ; 6702,7268 6716,7268 ; 6702,7270 6718,7270 ; 6704,7272 6720,7272 ; 6706,7028 6722,7028 ; 6706,7166 6718,7166 ; 6706,7168 6718,7168 ; 6706,7170 6716,7170 ; 6706,7172 6716,7172 ; 6706,7174 6716,7174 ; 6706,7176 6716,7176 ; 6706,7178 6716,7178 ; 6706,7180 6716,7180 ; 6706,7182 6716,7182 ; 6706,7184 6718,7184 ; 6706,7186 6718,7186 ; 6706,7188 6718,7188 ; 6706,7274 6722,7274 ; 6708,7026 6724,7026 ; 6708,7158 6720,7158 ; 6708,7160 6720,7160 ; 6708,7162 6718,7162 ; 6708,7164 6718,7164 ; 6708,7190 6718,7190 ; 6708,7192 6718,7192 ; 6708,7194 6718,7194 ; 6708,7196 6720,7196 ; 6708,7198 6720,7198 ; 6708,7200 6720,7200 ; 6708,7276 6724,7276 ; 6710,7024 6728,7024 ; 6710,7154 6722,7154 ; 6710,7156 6722,7156 ; 6710,7202 6722,7202 ; 6710,7204 6722,7204 ; 6710,7278 6726,7278 ; 6712,7022 6730,7022 ; 6712,7150 6724,7150 ; 6712,7152 6724,7152 ; 6712,7206 6724,7206 ; 6712,7208 6724,7208 ; 6712,7210 6726,7210 ; 6712,7280 6728,7280 ; 6714,7146 6728,7146 ; 6714,7148 6726,7148 ; 6714,7212 6728,7212 ; 6714,7282 6730,7282 ; 6716,7020 6732,7020 ; 6716,7144 6730,7144 ; 6716,7214 6728,7214 ; 6716,7216 6732,7216 ; 6716,7284 6732,7284 ; 6718,7018 6736,7018 ; 6718,7140 6736,7140 ; 6718,7142 6732,7142 ; 6718,7218 6734,7218 ; 6718,7286 6736,7286 ; 6720,7016 6738,7016 ; 6720,7138 6740,7138 ; 6720,7220 6738,7220 ; 6720,7288 6738,7288 ; 6722,7014 6742,7014 ; 6722,7136 6744,7136 ; 6722,7222 6742,7222 ; 6724,7224 6752,7224 ; 6724,7290 6742,7290 ; 6726,7012 6744,7012 ; 6726,7134 6750,7134 ; 6726,7226 6804,7226 ; 6726,7292 6744,7292 ; 6728,7010 6748,7010 ; 6728,7132 6800,7132 ; 6728,7294 6746,7294 ; 6730,7008 6750,7008 ; 6730,7130 6796,7130 ; 6730,7228 6802,7228 ; 6730,7296 6750,7296 ; 6734,7006 6754,7006 ; 6734,7128 6792,7128 ; 6734,7230 6798,7230 ; 6734,7298 6754,7298 ; 6736,7300 6756,7300 ; 6738,7004 6756,7004 ; 6738,7232 6794,7232 ; 6738,7302 6760,7302 ; 6740,7002 6760,7002 ; 6740,7126 6786,7126 ; 6742,7000 6764,7000 ; 6742,7304 6764,7304 ; 6746,6998 6768,6998 ; 6746,7124 6780,7124 ; 6746,7234 6788,7234 ; 6746,7306 6770,7306 ; 6748,6996 6770,6996 ; 6750,7308 6774,7308 ; 6752,6994 6774,6994 ; 6752,7310 6778,7310 ; 6756,6992 6774,6992 ; 6756,7122 6770,7122 ; 6756,7312 6784,7312 ; 6758,7236 6776,7236 ; 6760,6990 6776,6990 ; 6760,7314 6790,7314 ; 6764,6988 6776,6988 ; 6766,6878 6776,6878 ; 6766,6880 6776,6880 ; 6766,6882 6776,6882 ; 6766,6884 6776,6884 ; 6766,6886 6776,6886 ; 6766,6888 6776,6888 ; 6766,6890 6776,6890 ; 6766,6892 6776,6892 ; 6766,6894 6776,6894 ; 6766,6896 6776,6896 ; 6766,6898 6776,6898 ; 6766,6900 6776,6900 ; 6766,6902 6776,6902 ; 6766,6904 6776,6904 ; 6766,6906 6778,6906 ; 6766,6908 6776,6908 ; 6766,6910 6778,6910 ; 6766,6912 6778,6912 ; 6766,6914 6778,6914 ; 6766,6916 6778,6916 ; 6766,6918 6778,6918 ; 6766,6920 6778,6920 ; 6766,6922 6778,6922 ; 6766,6924 6778,6924 ; 6766,6926 6778,6926 ; 6766,6928 6778,6928 ; 6766,6930 6778,6930 ; 6766,6932 6778,6932 ; 6766,6934 6778,6934 ; 6766,6936 6778,6936 ; 6766,6938 6778,6938 ; 6766,6940 6778,6940 ; 6766,6942 6778,6942 ; 6766,6944 6778,6944 ; 6766,6946 6778,6946 ; 6766,6948 6778,6948 ; 6766,6950 6778,6950 ; 6766,6952 6778,6952 ; 6766,6954 6778,6954 ; 6766,6956 6778,6956 ; 6766,6958 6778,6958 ; 6766,6960 6778,6960 ; 6766,6962 6778,6962 ; 6766,6964 6778,6964 ; 6766,6966 6778,6966 ; 6766,6968 6778,6968 ; 6766,6970 6778,6970 ; 6766,6972 6778,6972 ; 6766,6974 6778,6974 ; 6766,6976 6776,6976 ; 6766,6978 6776,6978 ; 6766,6980 6776,6980 ; 6766,6982 6776,6982 ; 6766,6984 6776,6984 ; 6766,6986 6776,6986 ; 6766,7146 6814,7146 ; 6766,7148 6814,7148 ; 6766,7150 6816,7150 ; 6766,7152 6818,7152 ; 6766,7154 6818,7154 ; 6766,7156 6820,7156 ; 6766,7316 6798,7316 ; 6768,6876 6774,6876 ; 6768,7142 6810,7142 ; 6768,7144 6812,7144 ; 6768,7158 6820,7158 ; 6768,7160 6820,7160 ; 6768,7162 6822,7162 ; 6768,7164 6822,7164 ; 6770,7138 6806,7138 ; 6770,7140 6808,7140 ; 6770,7166 6808,7166 ; 6770,7318 6806,7318 ; 6772,7168 6806,7168 ; 6774,7076 6790,7076 ; 6774,7078 6788,7078 ; 6774,7080 6784,7080 ; 6774,7082 6782,7082 ; 6774,7134 6802,7134 ; 6774,7136 6804,7136 ; 6774,7170 6804,7170 ; 6774,7320 6820,7320 ; 6776,7074 6794,7074 ; 6778,7072 6796,7072 ; 6778,7172 6800,7172 ; 6780,7070 6800,7070 ; 6780,7322 6938,7322 ; 6782,7068 6806,7068 ; 6784,7224 6806,7224 ; 6786,7066 6810,7066 ; 6786,7324 6930,7324 ; 6790,7064 6814,7064 ; 6790,7222 6810,7222 ; 6792,7062 6820,7062 ; 6792,7174 6794,7174 ; 6794,7220 6812,7220 ; 6794,7326 6920,7326 ; 6796,7060 6828,7060 ; 6798,7218 6812,7218 ; 6800,7058 6838,7058 ; 6800,7216 6814,7216 ; 6802,7214 6816,7214 ; 6802,7328 6912,7328 ; 6804,7212 6816,7212 ; 6806,7056 6892,7056 ; 6806,7208 6820,7208 ; 6806,7210 6818,7210 ; 6808,7204 6820,7204 ; 6808,7206 6820,7206 ; 6810,7054 6886,7054 ; 6810,7200 6822,7200 ; 6810,7202 6822,7202 ; 6812,7166 6822,7166 ; 6812,7168 6824,7168 ; 6812,7170 6824,7170 ; 6812,7172 6824,7172 ; 6812,7174 6824,7174 ; 6812,7190 6824,7190 ; 6812,7192 6824,7192 ; 6812,7194 6824,7194 ; 6812,7196 6822,7196 ; 6812,7198 6822,7198 ; 6814,7176 6824,7176 ; 6814,7178 6824,7178 ; 6814,7180 6824,7180 ; 6814,7182 6824,7182 ; 6814,7184 6824,7184 ; 6814,7186 6824,7186 ; 6814,7188 6824,7188 ; 6814,7330 6896,7330 ; 6816,7052 6880,7052 ; 6822,7050 6874,7050 ; 6828,7332 6874,7332 ; 6832,7048 6866,7048 ; 6858,7058 6896,7058 ; 6870,7060 6900,7060 ; 6872,7166 6884,7166 ; 6872,7168 6884,7168 ; 6872,7170 6884,7170 ; 6872,7172 6884,7172 ; 6872,7174 6884,7174 ; 6872,7176 6884,7176 ; 6872,7178 6884,7178 ; 6872,7180 6884,7180 ; 6872,7182 6884,7182 ; 6872,7184 6884,7184 ; 6872,7186 6884,7186 ; 6874,7160 6886,7160 ; 6874,7162 6886,7162 ; 6874,7164 6884,7164 ; 6874,7188 6884,7188 ; 6874,7190 6884,7190 ; 6874,7192 6884,7192 ; 6874,7194 6886,7194 ; 6874,7196 6886,7196 ; 6874,7198 6886,7198 ; 6876,7062 6902,7062 ; 6876,7154 6888,7154 ; 6876,7156 6888,7156 ; 6876,7158 6886,7158 ; 6876,7200 6888,7200 ; 6876,7202 6936,7202 ; 6878,7150 6890,7150 ; 6878,7152 6890,7152 ; 6878,7204 6936,7204 ; 6878,7206 6936,7206 ; 6880,7146 6894,7146 ; 6880,7148 6892,7148 ; 6880,7208 6936,7208 ; 6880,7210 6936,7210 ; 6882,7064 6908,7064 ; 6882,7144 6896,7144 ; 6882,7212 6934,7212 ; 6884,7140 6900,7140 ; 6884,7142 6898,7142 ; 6884,7214 6934,7214 ; 6886,7138 6904,7138 ; 6886,7216 6932,7216 ; 6886,7320 6944,7320 ; 6888,7066 6910,7066 ; 6888,7136 6906,7136 ; 6888,7218 6930,7218 ; 6890,7134 6910,7134 ; 6890,7196 6932,7196 ; 6890,7198 6934,7198 ; 6890,7200 6936,7200 ; 6890,7220 6928,7220 ; 6892,7068 6912,7068 ; 6892,7194 6930,7194 ; 6892,7222 6924,7222 ; 6894,7132 6916,7132 ; 6894,7192 6928,7192 ; 6894,7224 6970,7224 ; 6896,7070 6916,7070 ; 6896,7130 6924,7130 ; 6896,7190 6926,7190 ; 6898,7072 6918,7072 ; 6898,7128 6968,7128 ; 6898,7226 6966,7226 ; 6900,7188 6922,7188 ; 6902,7074 6922,7074 ; 6902,7126 6964,7126 ; 6902,7228 6962,7228 ; 6904,7318 6950,7318 ; 6906,7076 6924,7076 ; 6906,7124 6960,7124 ; 6908,7078 6926,7078 ; 6908,7186 6918,7186 ; 6908,7230 6958,7230 ; 6910,7080 6926,7080 ; 6912,7122 6954,7122 ; 6914,7082 6926,7082 ; 6914,7232 6952,7232 ; 6916,7084 6924,7084 ; 6916,7316 6956,7316 ; 6920,7120 6946,7120 ; 6924,7314 6962,7314 ; 6926,7234 6942,7234 ; 6932,7312 6966,7312 ; 6938,7130 6970,7130 ; 6940,7310 6972,7310 ; 6946,7308 6976,7308 ; 6948,7222 6972,7222 ; 6950,7132 6974,7132 ; 6952,7306 6980,7306 ; 6954,7220 6974,7220 ; 6956,7134 6976,7134 ; 6958,7218 6976,7218 ; 6958,7304 6984,7304 ; 6960,7136 6978,7136 ; 6962,7138 6980,7138 ; 6962,7216 6978,7216 ; 6962,7302 6986,7302 ; 6964,7214 6980,7214 ; 6966,7140 6982,7140 ; 6966,7212 6982,7212 ; 6966,7300 6990,7300 ; 6968,7142 6984,7142 ; 6970,7144 6984,7144 ; 6970,7210 6984,7210 ; 6970,7298 6994,7298 ; 6972,7146 6986,7146 ; 6972,7208 6986,7208 ; 6974,6984 6986,6984 ; 6974,6986 6986,6986 ; 6974,6988 6986,6988 ; 6974,6990 6988,6990 ; 6974,6992 6992,6992 ; 6974,7148 6986,7148 ; 6974,7204 6988,7204 ; 6974,7206 6986,7206 ; 6976,6978 6988,6978 ; 6976,6980 6988,6980 ; 6976,6982 6986,6982 ; 6976,6994 6994,6994 ; 6976,7150 6988,7150 ; 6976,7152 6988,7152 ; 6976,7202 6990,7202 ; 6976,7296 6998,7296 ; 6978,6972 6990,6972 ; 6978,6974 6990,6974 ; 6978,6976 6988,6976 ; 6978,6996 6996,6996 ; 6978,7154 6990,7154 ; 6978,7156 6990,7156 ; 6978,7200 6990,7200 ; 6980,6966 6992,6966 ; 6980,6968 6992,6968 ; 6980,6970 6992,6970 ; 6980,6998 6998,6998 ; 6980,7158 6992,7158 ; 6980,7160 6992,7160 ; 6980,7196 6992,7196 ; 6980,7198 6992,7198 ; 6980,7294 7000,7294 ; 6982,6960 6994,6960 ; 6982,6962 6994,6962 ; 6982,6964 6992,6964 ; 6982,7162 6992,7162 ; 6982,7164 6994,7164 ; 6982,7166 6994,7166 ; 6982,7168 6994,7168 ; 6982,7190 6994,7190 ; 6982,7192 6994,7192 ; 6982,7194 6992,7194 ; 6982,7292 7002,7292 ; 6984,6954 6996,6954 ; 6984,6956 6996,6956 ; 6984,6958 6994,6958 ; 6984,7000 7000,7000 ; 6984,7170 6994,7170 ; 6984,7172 6994,7172 ; 6984,7174 6996,7174 ; 6984,7176 6996,7176 ; 6984,7178 6996,7178 ; 6984,7180 6996,7180 ; 6984,7182 6996,7182 ; 6984,7184 6996,7184 ; 6984,7186 6994,7186 ; 6984,7188 6994,7188 ; 6986,6944 6998,6944 ; 6986,6946 6998,6946 ; 6986,6948 6996,6948 ; 6986,6950 6996,6950 ; 6986,6952 6996,6952 ; 6986,7002 7002,7002 ; 6986,7290 7006,7290 ; 6988,6934 7000,6934 ; 6988,6936 7000,6936 ; 6988,6938 7000,6938 ; 6988,6940 6998,6940 ; 6988,6942 6998,6942 ; 6988,7004 7004,7004 ; 6990,6922 7002,6922 ; 6990,6924 7002,6924 ; 6990,6926 7002,6926 ; 6990,6928 7000,6928 ; 6990,6930 7000,6930 ; 6990,6932 7000,6932 ; 6990,7006 7006,7006 ; 6990,7288 7008,7288 ; 6992,6904 7004,6904 ; 6992,6906 7004,6906 ; 6992,6908 7004,6908 ; 6992,6910 7004,6910 ; 6992,6912 7004,6912 ; 6992,6914 7002,6914 ; 6992,6916 7002,6916 ; 6992,6918 7002,6918 ; 6992,6920 7002,6920 ; 6992,7286 7012,7286 ; 6994,6886 7006,6886 ; 6994,6888 7006,6888 ; 6994,6890 7006,6890 ; 6994,6892 7006,6892 ; 6994,6894 7004,6894 ; 6994,6896 7004,6896 ; 6994,6898 7004,6898 ; 6994,6900 7004,6900 ; 6994,6902 7004,6902 ; 6994,7008 7008,7008 ; 6996,6876 7006,6876 ; 6996,6878 7006,6878 ; 6996,6880 7006,6880 ; 6996,6882 7006,6882 ; 6996,6884 7006,6884 ; 6996,7010 7010,7010 ; 6996,7284 7014,7284 ; 6998,6874 7004,6874 ; 6998,7012 7012,7012 ; 6998,7282 7016,7282 ; 7000,7014 7014,7014 ; 7000,7280 7018,7280 ; 7002,7016 7016,7016 ; 7004,7018 7018,7018 ; 7004,7278 7020,7278 ; 7006,7020 7020,7020 ; 7006,7022 7022,7022 ; 7006,7276 7022,7276 ; 7008,7024 7022,7024 ; 7008,7274 7024,7274 ; 7010,7026 7024,7026 ; 7010,7272 7026,7272 ; 7012,7028 7026,7028 ; 7014,7030 7028,7030 ; 7014,7032 7028,7032 ; 7014,7268 7030,7268 ; 7014,7270 7028,7270 ; 7016,7034 7030,7034 ; 7016,7266 7032,7266 ; 7018,7036 7032,7036 ; 7018,7264 7034,7264 ; 7020,7038 7032,7038 ; 7020,7040 7034,7040 ; 7020,7262 7034,7262 ; 7022,7042 7036,7042 ; 7022,7260 7036,7260 ; 7024,7044 7036,7044 ; 7024,7046 7038,7046 ; 7024,7258 7038,7258 ; 7026,7048 7038,7048 ; 7026,7254 7040,7254 ; 7026,7256 7038,7256 ; 7028,7050 7040,7050 ; 7028,7052 7042,7052 ; 7028,7252 7042,7252 ; 7030,7054 7042,7054 ; 7030,7056 7044,7056 ; 7030,7250 7042,7250 ; 7032,7058 7044,7058 ; 7032,7246 7044,7246 ; 7032,7248 7044,7248 ; 7034,7060 7046,7060 ; 7034,7062 7046,7062 ; 7034,7242 7046,7242 ; 7034,7244 7046,7244 ; 7036,7064 7048,7064 ; 7036,7066 7048,7066 ; 7036,7238 7048,7238 ; 7036,7240 7048,7240 ; 7038,7068 7050,7068 ; 7038,7070 7050,7070 ; 7038,7072 7050,7072 ; 7038,7234 7050,7234 ; 7038,7236 7050,7236 ; 7040,7074 7052,7074 ; 7040,7076 7052,7076 ; 7040,7230 7052,7230 ; 7040,7232 7052,7232 ; 7042,7078 7054,7078 ; 7042,7080 7054,7080 ; 7042,7226 7054,7226 ; 7042,7228 7054,7228 ; 7044,7082 7054,7082 ; 7044,7084 7056,7084 ; 7044,7086 7056,7086 ; 7044,7220 7056,7220 ; 7044,7222 7056,7222 ; 7044,7224 7054,7224 ; 7046,7088 7056,7088 ; 7046,7090 7058,7090 ; 7046,7214 7058,7214 ; 7046,7216 7058,7216 ; 7046,7218 7056,7218 ; 7048,7092 7058,7092 ; 7048,7094 7058,7094 ; 7048,7096 7060,7096 ; 7048,7208 7060,7208 ; 7048,7210 7060,7210 ; 7048,7212 7058,7212 ; 7050,7098 7060,7098 ; 7050,7100 7060,7100 ; 7050,7102 7062,7102 ; 7050,7104 7062,7104 ; 7050,7106 7062,7106 ; 7050,7200 7062,7200 ; 7050,7202 7062,7202 ; 7050,7204 7060,7204 ; 7050,7206 7060,7206 ; 7052,7108 7062,7108 ; 7052,7110 7064,7110 ; 7052,7112 7064,7112 ; 7052,7190 7064,7190 ; 7052,7192 7064,7192 ; 7052,7194 7064,7194 ; 7052,7196 7062,7196 ; 7052,7198 7062,7198 ; 7054,7114 7064,7114 ; 7054,7116 7064,7116 ; 7054,7118 7064,7118 ; 7054,7120 7066,7120 ; 7054,7122 7066,7122 ; 7054,7124 7066,7124 ; 7054,7178 7066,7178 ; 7054,7180 7066,7180 ; 7054,7182 7066,7182 ; 7054,7184 7066,7184 ; 7054,7186 7064,7186 ; 7054,7188 7064,7188 ; 7056,7126 7066,7126 ; 7056,7128 7066,7128 ; 7056,7130 7066,7130 ; 7056,7132 7066,7132 ; 7056,7134 7068,7134 ; 7056,7136 7068,7136 ; 7056,7138 7068,7138 ; 7056,7140 7068,7140 ; 7056,7142 7068,7142 ; 7056,7144 7068,7144 ; 7056,7146 7068,7146 ; 7056,7148 7068,7148 ; 7056,7150 7068,7150 ; 7056,7152 7068,7152 ; 7056,7154 7068,7154 ; 7056,7156 7068,7156 ; 7056,7158 7068,7158 ; 7056,7160 7068,7160 ; 7056,7162 7068,7162 ; 7056,7164 7068,7164 ; 7056,7166 7068,7166 ; 7056,7168 7068,7168 ; 7056,7170 7066,7170 ; 7056,7172 7066,7172 ; 7056,7174 7066,7174 ; 7056,7176 7066,7176

## Keep-outs
Keep-Out Layer:
  the board outline again, w15

## Other copper
Bottom Layer:
  text "冯振邦" at 5513,8476.5 h100
  text "黄鹏坤" at 5513,8390 h100
  text "黄荣寸" at 5513,8296.5 h100
  text "秦   柯" at 5518,8210 h100
  text "李家健" at 5513,8125.52 h100

## Text inside footprints (layer, text, board x,y; h text height)
C2: Top Overlay "+" at 5443.8,7414.74 h31.5 r180
C3: Top Overlay "+" at 5445.4,7564.74 h31.5 r180